# EAGLE board maplepad_pro (EAGLE 9.6.1)
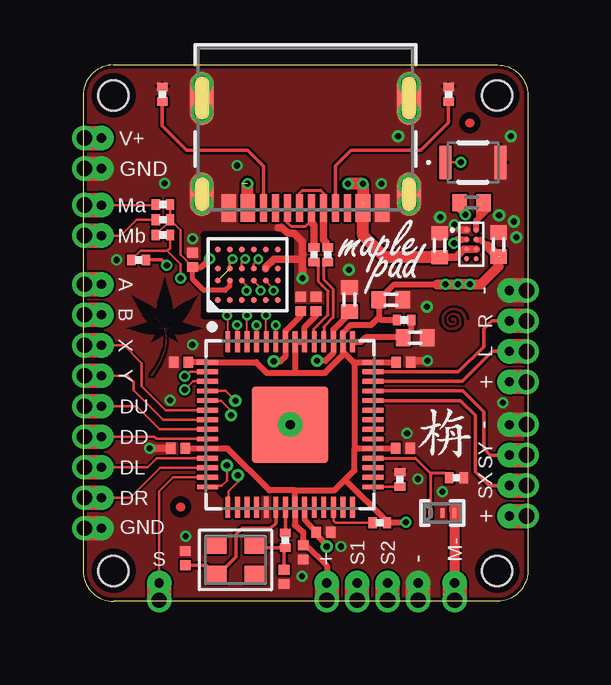
[diagram p0: board, top side]
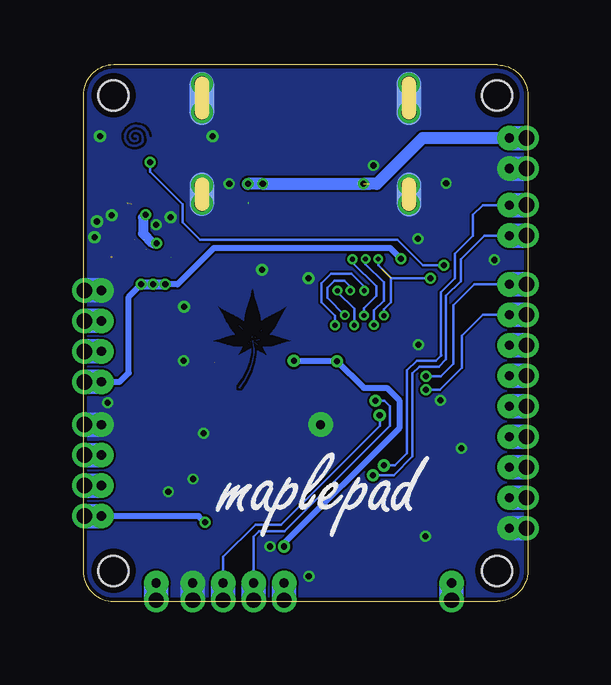
[diagram p1: board, bottom side, seen from below]

Size 18.54 x 22.35 mm. Coordinates in mm from the lower left corner, seen from the top.
Outline: 17.27,22.35 arc-90 18.54,21.08 18.54,1.27 arc-90 17.27,0 1.27,0 arc-90 0,1.27 0,21.08 arc-90 1.27,22.35 17.27,22.35
Copper layers (1*16): Top 0.035mm / dielectric 0.75mm / Bottom 0.035mm
Design rules "default *": minimum track width 3.5mil, minimum drill 8mil, track to track 3.5mil, track to pad 3.5mil, pad to pad 3.5mil, via to via 3.5mil, smd to smd 3.5mil, copper to edge 6mil, drill to drill 6mil, minimum pad ring 4mil, minimum via ring 4mil, stop-mask expansion 0mil, vias tented up to drill 30mil, thermal gap 10mil
Net classes: 1 power: width 0.305 mm
Holes 1.25 mm at 1.27,21.08 17.27,21.08 1.27,1.27 17.27,1.27
tRestrict: area 1.8,10.8 to 5,13.5; area 7,5.6 to 10.3,9.1; area 0.4,0.4 to 2.2,2.2; area 16.4,0.4 to 18.2,2.2; area 16.4,20.2 to 18.2,22; area 0.4,20.2 to 2.2,22; area 15.7,19.5 to 16.6,20.4; area 3.6,3.5 to 4.5,4.4; area 14.8,11.2 to 16.1,12.3; 17 lines
bRestrict: area 9.9,10.3 to 13.1,13; area 0.4,20.2 to 2.2,22; area 16.4,20.2 to 18.2,22; area 16.4,0.4 to 18.2,2.2; area 0.4,0.4 to 2.2,2.2; area 15.7,18.8 to 16.9,20

## Footprints (pad centres in the part's own frame; a part is rotated, then mirrored left to right if it is on the bottom)
TP10R = smd 1 x 1: TP 0,0
C0402 = smd 0.6 x 0.7: 1 -0.5,0; 2 0.5,0
C0201 = smd 0.4 x 0.45: 1 -0.3,0; 2 0.3,0
QFN56_7MM_REDUCEDEPAD = smd 0.875 x 0.2: 1 -3.45,2.6; 2 -3.45,2.2; 3 -3.45,1.8; 4 -3.45,1.4; 5 -3.45,1; 6 -3.45,0.6; 7 -3.45,0.2; 8 -3.45,-0.2; 9 -3.45,-0.6; 10 -3.45,-1; 11 -3.45,-1.4; 12 -3.45,-1.8; 13 -3.45,-2.2; 14 -3.45,-2.6; 29 3.45,-2.6; 30 3.45,-2.2; 31 3.45,-1.8; 32 3.45,-1.4; 33 3.45,-1; 34 3.45,-0.6; 35 3.45,-0.2; 36 3.45,0.2; 37 3.45,0.6; 38 3.45,1; 39 3.45,1.4; 40 3.45,1.8; 41 3.45,2.2; 42 3.45,2.6 | smd 0.2 x 0.875: 15 -2.6,-3.45; 16 -2.2,-3.45; 17 -1.8,-3.45; 18 -1.4,-3.45; 19 -1,-3.45; 20 -0.6,-3.45; 21 -0.2,-3.45; 22 0.2,-3.45; 23 0.6,-3.45; 24 1,-3.45; 25 1.4,-3.45; 26 1.8,-3.45; 27 2.2,-3.45; 28 2.6,-3.45; 43 2.6,3.45; 44 2.2,3.45; 45 1.8,3.45; 46 1.4,3.45; 47 1,3.45; 48 0.6,3.45; 49 0.2,3.45; 50 -0.2,3.45; 51 -0.6,3.45; 52 -1,3.45; 53 -1.4,3.45; 54 -1.8,3.45; 55 -2.2,3.45; 56 -2.6,3.45 | smd 3.2 x 3.2: P$1 0,0
2171790001_MOL = smd 0.991 x 1.803 bottom: 1 -4.316,2.728; 2 4.32,2.733 | smd 0.991 x 2.21 bottom: 3 4.316,-1.272; 4 -4.32,-1.272 | smd 0.991 x 2.21: 13 -4.32,-1.272; 14 4.32,-1.272 | smd 0.991 x 1.803: 15 -4.32,2.728; 16 4.32,2.728 | smd 0.61 x 1.143: A1/B12 -3.2,3.303; A4/B9 -2.4,3.303; B1/A12 3.2,3.303; B4/A9 2.4,3.303 | smd 0.305 x 1.143: A5 -1.25,3.303; A6 -0.25,3.303; A7 0.25,3.303; A8 1.25,3.303; B5 1.75,3.303; B6 0.75,3.303; B7 -0.75,3.303; B8 -1.75,3.303 | drill 0.61 pad 0.61: S_1_H1 -4.318,-0.686; S_1_H2 -4.318,-1.88; S_2_H1 4.318,-0.686; S_2_H2 4.318,-1.88; S_3_H1 -4.318,3.124; S_3_H2 -4.318,2.337; S_4_H1 4.318,3.124; S_4_H2 4.318,2.337
R0402 = smd 0.6 x 0.7: 1 -0.5,0; 2 0.5,0
R0201 = smd 0.35 x 0.45: 1 -0.3,0; 2 0.3,0
GSNAN0T000101 = smd 0.5 x 1.4: 1 -1.15,0; 2 1.15,0
YJK3_TEX = smd 0.4 x 0.16: 1 0,0; 2 0,-0.5; 3 0,0.5
ISL9122A = smd 0.215 x 0.215: A1 -0.2,0.6; A2 0.2,0.6; B1 -0.2,0.2; B2 0.2,0.2; C1 -0.2,-0.2; C2 0.2,-0.2; D1 -0.2,-0.6; D2 0.2,-0.6
WLCSP24 = smd 0.25 x 0.25: A1 -1.05,1.25; A2 -0.25,1.25; A3 0.25,1.25; A4 1.05,1.25; B1 -1.05,0.75; B2 -0.25,0.75; B3 0.25,0.75; B4 1.05,0.75; C1 -1.05,0.25; C2 -0.25,0.25; C3 0.25,0.25; C4 1.05,0.25; D1 -1.05,-0.25; D2 -0.25,-0.25; D3 0.25,-0.25; D4 1.05,-0.25; E1 -1.05,-0.75; E2 -0.25,-0.75; E3 0.25,-0.75; E4 1.05,-0.75; F1 -1.05,-1.25; F2 -0.25,-1.25; F3 0.25,-1.25; F4 1.05,-1.25
CRYSTAL_2.5X2 = smd 0.9 x 0.75: 1 -0.825,-0.625; 2 0.825,-0.625; 3 0.825,0.625; 4 -0.825,0.625

## Placement (x,y rotation side)
A  TPTP10R  [TP10R]  0.76,13.21 0 top
A0  TPTP10R  [TP10R]  0.76,16.51 0 top
B  TPTP10R  [TP10R]  0.76,11.94 0 top
B0  TPTP10R  [TP10R]  0.76,15.24 0 top
BGND  TPTP10R  [TP10R]  0.76,3.05 90 top
C1  10uF  [C0402]  14.86,14.84 90 top
C2  15pF  [C0201]  4.27,1.8 270 top
C3  15pF  [C0201]  8.38,1.02 90 top
C4  10uF  [C0402]  17.33,14.87 90 top
C5  0.1uF  [C0201]  4.09,9.96 180 top
C6  0.1uF  [C0201]  3.96,6.38 180 top
C7  0.1uF  [C0201]  13.36,9.96 0 top
C8  0.1uF  [C0201]  13.34,6.38 0 top
C9  0.1uF  [C0201]  9.71,12.39 90 top
C10  0.1uF  [C0201]  4.57,14.22 90 top
C11  0.1uF  [C0201]  9.18,2.04 270 top
C12  1uF  [C0402]  12.83,12.57 0 top
C13  0.1uF  [C0201]  10.03,2.89 0 top
C14  0.1uF  [C0201]  9.08,12.39 90 top
C15  1uF  [C0402]  11.1,12.58 90 top
C16  2.2uF  [C0402]  13.85,10.98 0 top
DD  TPTP10R  [TP10R]  0.76,6.86 0 top
DL  TPTP10R  [TP10R]  0.76,5.59 0 top
DR  TPTP10R  [TP10R]  0.76,4.32 0 top
DU  TPTP10R  [TP10R]  0.76,8.13 0 top
IC1  RP2040_QFN56  [QFN56_7MM_REDUCEDEPAD]  8.64,7.37 0 top
J2  2171790001  [2171790001_MOL]  9.27,19.68 180 top
L  TPTP10R  [TP10R]  17.78,10.41 0 top
L2  MCEE1005T1R0MHN  [R0402]  16.2,16.61 0 top
LR3.1  TPTP10R  [TP10R]  0.76,19.3 0 top
LR3.3  TPTP10R  [TP10R]  17.78,9.14 0 top
LRGND  TPTP10R  [TP10R]  17.78,12.95 0 top
LRGND1  TPTP10R  [TP10R]  0.76,18.03 0 top
R  TPTP10R  [TP10R]  17.78,11.68 0 top
R1  10k  [R0201]  12.37,3.28 0 top
R2  5.1k  [R0201]  15.24,21.13 270 top
R3  1k  [R0201]  8.43,2.54 270 top
R4  10k  [R0201]  3.33,15.27 180 top
R6  200  [R0201]  13.39,11.73 180 top
R7  22  [R0201]  10.2,14.44 90 top
R8  22  [R0201]  9.63,14.44 90 top
R9  4.7k  [R0201]  3.33,15.9 180 top
R10  4.7k  [R0201]  3.33,16.54 180 top
R11  5.1k  [R0201]  3.3,21.13 270 top
R12  0-ohm for I2C OLED  [R0201]  13.21,5.08 90 top
R13  10k  [R0201]  15.57,5.16 0 top
R14  1k  [R0201]  2.31,14.22 0 top
S  TPTP10R  [TP10R]  3.18,0.76 0 top
S1  GSNAN0T000101  [GSNAN0T000101]  16.26,18.29 0 top
S3.3  TPTP10R  [TP10R]  17.78,3.56 0 top
SCL  TPTP10R  [TP10R]  12.7,0.76 90 top
SDA  TPTP10R  [TP10R]  11.43,0.76 90 top
SGND  TPTP10R  [TP10R]  17.78,7.37 0 top
SX  TPTP10R  [TP10R]  17.78,4.83 0 top
SY  TPTP10R  [TP10R]  17.78,6.1 0 top
U1  CSD17585F5T  [YJK3_TEX]  14.99,3.68 90 top
U$1  ISL9122A  [ISL9122A]  16.2,14.88 0 top
U$25  W25Q128JVYIQ-TR  [WLCSP24]  6.86,13.61 90 top
V3.3  TPTP10R  [TP10R]  10.16,0.76 90 top
VGND  TPTP10R  [TP10R]  13.97,0.76 90 top
X  TPTP10R  [TP10R]  0.76,10.67 0 top
Y  TPTP10R  [TP10R]  0.76,9.4 0 top
Y1  12MHZ  [CRYSTAL_2.5X2]  6.35,1.73 180 top

## Library data of the parts
A A0 B B0 BGND DD DL DR DU L LR3.1 LR3.3 LRGND LRGND1 R S S3.3 SCL SDA SGND SX SY V3.3 VGND X Y = testpad
C1-C16 L2 R1-R4 R6-R14 = resistor
IC1 U$1 U$25 Y1 = personal
J2 = personal; COPYRIGHT: Copyright (C) 2022 Ultra Librarian. All rights reserved.; MANUFACTURER_PART_NUMBER: 2171790001; MFR_NAME: Molex Connector Corporation
S1 = personal; DESCRIPTION: Tactile Switches NANOT 100 AS; HEIGHT: 0.55mm; MANUFACTURER_NAME: C & K COMPONENTS; MANUFACTURER_PART_NUMBER: GSNAN0T000101; MOUSER_PART_NUMBER: 611-GSNAN0T000101; MOUSER_PRICE-STOCK: https://www.mouser.co.uk/ProductDetail/CK/GSNAN0T000101?qs=bAKSY%2FctAC7diJ%2FxJL3YRQ%3D%3D
U1 = personal; COPYRIGHT: Copyright (C) 2018 Accelerated Designs. All rights reserved; MANUFACTURER_PART_NUMBER: CSD17585F5T; SOURCELIBRARY: TI_2019-05-21; VENDOR: Texas Instruments

## Nets
1.2V: C13.1 C14.1 C15.1 IC1.23 IC1.45 IC1.50
!RESET: IC1.26 R1.1
+3V3: C4.1 C5.1 C6.1 C7.1 C8.1 C9.1 C10.1 C11.1 C12.1 IC1.1 IC1.10 IC1.22 IC1.33 IC1.42 IC1.44 IC1.48 IC1.49 LR3.3.TP R1.2 R4.2 R6.2 R9.1 R10.1 S3.3.TP U$1.B2 U$25.B2 V3.3.TP
A: A.TP IC1.2
B: B.TP IC1.3
D+: IC1.47 R8.1
D-: IC1.46 R7.1
DD: DD.TP IC1.9
DL: DL.TP IC1.11
DR: DR.TP IC1.12
DU: DU.TP IC1.8
GND [power]: BGND.TP C1.2 C2.1 C3.1 C4.2 C5.2 C6.2 C7.2 C8.2 C9.2 C10.2 C11.2 C12.2 C13.2 C14.2 C15.2 C16.2 IC1.19 IC1.P$1 J2.1 J2.2 J2.3 J2.4 J2.13 J2.14 J2.15 J2.16 J2.A1/B12 J2.B1/A12 J2.S_1_H1 J2.S_1_H2 J2.S_2_H1 J2.S_2_H2 J2.S_3_H1 J2.S_3_H2 J2.S_4_H1 J2.S_4_H2 LRGND1.TP LRGND.TP R2.1 R11.1 R12.2 R13.2 S1.2 SGND.TP U1.1 U$1.A1 U$25.E3 VGND.TP
M-: U1.2
MAPLEA: A0.TP IC1.14 R10.2
MAPLEB: B0.TP IC1.15 R9.2
N$1: IC1.41 R.TP
N$2: IC1.40 L.TP
N$3: L2.1 U$1.B1
N$4: L2.2 U$1.A2
N$5: C2.2 IC1.20 Y1.3
N$6: C3.2 R3.2 Y1.1
N$7: IC1.21 R3.1
N$8: R14.2 S1.1
N$9: C16.1 IC1.43 R6.1
N$10: J2.A7 J2.B7 R7.2
N$11: J2.A6 J2.B6 R8.2
N$12: IC1.39 SY.TP
N$13: IC1.38 SX.TP
N$16: IC1.29 R12.1
N$17: J2.B5 R11.2
N$18: J2.A5 R2.2
N$20: IC1.32 R13.1 U1.3
QSPI_CS: IC1.56 R4.1 R14.1 U$25.B3
QSPI_DATA[0]: IC1.53 U$25.E2
QSPI_DATA[1]: IC1.55 U$25.C3
QSPI_DATA[2]: IC1.54 U$25.D3
QSPI_DATA[3]: IC1.51 U$25.C2
QSPI_SCK: IC1.52 U$25.D2
S: IC1.13 S.TP
SCL: IC1.5 SCL.TP
SDA: IC1.4 SDA.TP
VCC: C1.1 J2.A4/B9 J2.B4/A9 LR3.1.TP U$1.C1 U$1.C2
X: IC1.6 X.TP
Y: IC1.7 Y.TP

## Tracks (layer width: path | path; a pad name or v marks a point on that pad's centre or on a via)
1.2V  (via drill 0.25 pad 0.51)
  Top 0.254: IC1.23 9.24,3.41 C13.1 9.82,2.68 10.16,2.34 v10.16,2.29 | v7.95,10 8.23,10 8.44,10.21 IC1.50 8.44,11.26 9.08,11.9 C14.1 | v9.75,10.02 10.1,10.02 10.44,10.36 IC1.45 10.44,11.32 11.11,11.99 C15.1
  Bottom 0.254: v9.75,10.02 7.97,10.02 v7.95,10 6.84,8.89 5.88,8.89 5.36,8.37 5.36,7.21 10.16,2.41 v10.16,2.29
!RESET
  Top 0.102: IC1.26 10.44,3.36 10.45,3.34 10.52,3.28 R1.1
+3V3  (via drill 0.25 pad 0.46, 0.38 pad 1.02, 0.64 pad 1.02)  (3 unrouted)
  Top 0.102: 3.03,15.19 R4.2 3.63,15.86 R9.1 | C10.1 4.06,14.43 4.06,15.46 R9.1 | R10.1 R9.1
  Top 0.152: 17.5,3.56 S3.3.TP | 12.73,3.34 R1.2 12.67,3.33
  Top 0.203: U$25.B2 6.11,13.14 5.93,12.96 5.03,12.96 4.57,13.42 C10.1
  Top 0.254: C5.1 5.18,9.96 IC1.1 7.22,9.97 7.65,9.53 7.65,9.52 8.84,9.52 | C6.1 4.22,6.37 IC1.10 6.03,6.37 7.77,4.62 8.84,4.62 | C8.1 IC1.33 11.32,6.37 | C7.1 13.1,9.97 IC1.42 11.32,9.97 | 10.84,10.4 IC1.44 10.84,11.2 11.15,11.52 12.02,11.52 12.33,11.83 | 10.84,10.4 10.84,10.27 10.09,9.52 8.84,9.52 | 11.32,9.97 11.27,9.97 10.84,10.4 | U$1.B2 16.59,15.08 16.88,14.79 | 8.84,9.52 IC1.49 IC1.48 9.24,11.43 9.71,11.91 C9.1 | 8.84,4.62 IC1.22 8.84,3.18 9.18,2.89 C11.1 9.3,2.34 10.16,1.48 V3.3.TP | 11.32,9.97 11.32,6.37 | 11.32,6.37 11.32,5.46 10.93,5.07 | 10.93,5.07 10.48,4.62 8.84,4.62 | 10.93,5.07 12.67,3.33 | R1.2 12.7,3.3 v13.46,3.3 | 12.33,11.83 C12.1 12.97,13.21 14.77,13.21 | 12.33,11.83 12.44,11.73 R6.2 | C10.1 4.93,13.92 v5.28,14.27
  Top 0.406: 16.25,13.21 v16.12,13.21 | v16.12,13.21 v15.62,13.21 v15.11,13.21 14.77,13.21 | 17.4,14.36 17.31,14.36 16.88,14.79 | v16.12,13.21 16.59,13.21 17.33,13.95 C4.1
  Top 1.016: LR3.3.TP v18.49,9.14 | V3.3.TP v10.16,0.05 | S3.3.TP v18.49,3.56
  Bottom 0.254: v13.46,3.3 13.72,3.56 S3.3.TP | LR3.3.TP 17.02,9.14 16.64,9.52 16.64,12.69 v16.12,13.21 | v5.28,14.27 5.73,14.72 13.09,14.72 14.61,13.21 v15.11,13.21
  Bottom 0.406: v16.12,13.21 v15.62,13.21 v15.11,13.21
  Bottom 1.016: S3.3.TP v18.49,3.56 | V3.3.TP v10.16,0.05 | LR3.3.TP v18.49,9.14
  other vias: 10.16,0.76 17.78,3.56 17.78,9.14
A  (via drill 0.25 pad 0.46, 0.38 pad 1.02, 0.64 pad 1.02)
  Top 0.102: IC1.2 4.44,9.57 v4.24,9.37
  Top 1.016: A.TP v0.05,13.21
  Bottom 0.102: v4.24,9.37 3.63,9.37 3.1,9.91 3.1,12.34 2.24,13.21 A.TP
  Bottom 1.016: A.TP v0.05,13.21
  other vias: 0.76,13.21
B  (via drill 0.25 pad 0.46, 0.38 pad 1.02, 0.64 pad 1.02)
  Top 0.102: IC1.3 4.59,9.17 v4.24,8.81
  Top 1.016: B.TP v0.05,11.94
  Bottom 0.102: B.TP 1.88,11.94 2.74,11.07 2.74,9.73 3.66,8.81 v4.24,8.81
  Bottom 1.016: B.TP v0.05,11.94
  other vias: 0.76,11.94
D+
  Top 0.127: IC1.47 9.64,11.36 10.21,11.94 10.21,12.93 9.98,13.16 | R8.1 9.83,13.95 9.83,13.31 9.98,13.16 | 9.98,13.16 9.96,13.18
D-
  Top 0.127: 10.31,14.04 R7.1 10.2,14.12 10.05,13.96 10.05,13.4 10.43,13.01 10.43,11.83 10.04,11.43 IC1.46
DD  (via drill 0.38 pad 1.02, 0.64 pad 1.02)
  Top 0.102: IC1.9 3.06,6.77 2.97,6.86 DD.TP
  Top 1.016: DD.TP v0.05,6.86
  Bottom 1.016: DD.TP v0.05,6.86
  other vias: 0.76,6.86
DL  (via drill 0.38 pad 1.02, 0.64 pad 1.02)
  Top 0.102: DL.TP 2.69,5.59 3.07,5.97 IC1.11
  Top 1.016: DL.TP v0.05,5.59
  Bottom 1.016: DL.TP v0.05,5.59
  other vias: 0.76,5.59
DR  (via drill 0.38 pad 1.02, 0.64 pad 1.02)
  Top 0.102: IC1.12 3.2,5.57 1.96,4.32 DR.TP
  Top 1.016: DR.TP v0.05,4.32
  Bottom 1.016: DR.TP v0.05,4.32
  other vias: 0.76,4.32
DU  (via drill 0.38 pad 1.02, 0.64 pad 1.02)
  Top 0.102: DU.TP 2.24,8.13 3.2,7.17 IC1.8
  Top 1.016: DU.TP v0.05,8.13
  Bottom 1.016: DU.TP v0.05,8.13
  other vias: 0.76,8.13
GND  (via drill 0.25 pad 0.46, 0.25 pad 0.51, 0.38 pad 1.02, 0.64 pad 1.02)
  Top 0.305: 13.63,9.98 13.67,10.02 v14.35,10.02 | C15.2 | C6.2 v2.77,6.38 | U$25.E3 7.62,13.91 7.96,14.26 9.11,14.26 9.14,14.22 | v9.14,13.46 9.14,14.22 | 9.14,14.22 9.14,14.99 8.8,15.33 8.54,15.33 8.3,15.57 8.13,15.57 | U$1.A1 15.71,15.47 v15.49,15.7
  Top 1.016: LRGND.TP v18.49,12.95 | SGND.TP v18.49,7.37 | VGND.TP v13.97,0.05 | BGND.TP v0.05,3.05 | v0.05,18.03 LRGND1.TP
  Bottom 1.016: LRGND.TP v18.49,12.95 | SGND.TP v18.49,7.37 | VGND.TP v13.97,0.05 | BGND.TP v0.05,3.05 | v0.05,18.03 LRGND1.TP
  other vias: 18.07,15.18 17.97,15.83 13.97,0.76 17.78,7.37 17.78,12.95 8.64,7.37 13.51,7.01 4.56,10.69 10.75,2.29 9.13,1.04 4.27,2.72 0.76,3.05 0.76,18.03 17.35,16.09 11.08,13.82 4.57,15.11 12.45,17.4 3.4,17.42 13.95,5.1 14.99,4.57 14.33,12.28 17.51,8.27 6.43,18.16 1.4,14.22 13.14,19.38 14.89,16 17.84,19.38 3.63,8.38
  pour Bottom (rank 2, no thermals): 0,21.08 0,1.27 arc90 1.27,0 17.27,0 arc90 18.54,1.27 18.54,21.08 arc90 17.27,22.35 1.27,22.35 arc90
  pour Top (rank 2, no thermals): 0,21.08 0,1.27 arc90 1.27,0 17.27,0 arc90 18.54,1.27 18.54,21.08 arc90 17.27,22.35 1.27,22.35 arc90
  pour Top: 15.09,12.06 15.09,11.38 15.7,11.38 15.7,12.06
  pour Bottom (no thermals): 17.09,20.04 17.09,18.59 15.44,18.59 15.44,20.04
M-  (via drill 0.38 pad 1.02, 0.64 pad 1.02)
  Top 0.406: v15.49,0.76 v15.49,0.77 U1.2 15.49,3.93
  Top 1.016: v15.49,0.76 v15.49,0.05
  Bottom 1.016: v15.49,0.76 v15.49,0.05
MAPLEA  (via drill 0.25 pad 0.51, 0.38 pad 1.02, 0.64 pad 1.02)
  Top 0.102: IC1.14 5.51,4.77 5.56,4.82 5.78,4.82 5.99,5.03 v5.99,5.66 | R10.2 3,16.51 A0.TP
  Top 1.016: A0.TP v0.05,16.51
  Bottom 0.102: A0.TP 1.88,16.51 2.29,16.1 2.29,15.24 3.05,14.48 3.05,13.46 3.63,12.88 3.63,10.24 | 3.63,10.24 3.84,10.03 4.62,10.03 5.03,9.63 5.03,6.17 5.54,5.66 v5.99,5.66 | 3.63,10.24 3.61,10.26
  Bottom 1.016: v0.05,16.51 A0.TP
  other vias: 0.76,16.51
MAPLEB  (via drill 0.25 pad 0.51, 0.38 pad 1.02, 0.64 pad 1.02)
  Top 0.102: IC1.15 6.04,4.29 6.06,4.31 6.06,4.59 6.45,4.98 v6.45,5.26 | B0.TP 1.58,15.24 2.24,15.9 R9.2
  Top 1.016: B0.TP v0.05,15.24
  Bottom 0.102: B0.TP 1.8,15.24 2.79,14.25 2.79,13.33 3.4,12.72 3.4,10.08 3.71,9.78 4.52,9.78 4.8,9.5 4.8,6.04 5.59,5.26 v6.45,5.26
  Bottom 1.016: v0.05,15.24 B0.TP
  other vias: 0.76,15.24
N$1  (via drill 0.38 pad 1.02, 0.64 pad 1.02)
  Top 0.152: IC1.41 15.66,9.56 16.71,10.62 16.71,11.35 17.04,11.68 R.TP
  Top 1.016: R.TP v18.49,11.68
  Bottom 1.016: R.TP v18.49,11.68
  other vias: 17.78,11.68
N$2  (via drill 0.38 pad 1.02, 0.64 pad 1.02)
  Top 0.152: L.TP 17.07,10.41 15.82,9.17 IC1.40
  Top 1.016: L.TP v18.49,10.41
  Bottom 1.016: L.TP v18.49,10.41
  other vias: 17.78,10.41
N$3  (via drill 0.25 pad 0.46)  (1 unrouted)
  Top 0.254: U$1.B1 15.77,15.07 15.75,15.06
  Top 0.305: v15.47,14.92 15.61,15.06 15.75,15.06 | L2.1 15.7,16.35 v15.94,16.11
  Bottom 0.406: v15.94,16.11 16.05,16 16.05,15.34 15.63,14.92 v15.47,14.92
N$4  (1 unrouted)
  Top 0.254: U$1.A2 16.4,15.86 16.53,15.99 | 16.53,15.99 16.87,16.34 | 16.53,15.99 16.53,16.56
N$5
  Top 0.152: 5.13,1.5 | C2.2 5.13,1.5 | 5.13,1.5 Y1.3 5.62,1.1 6.38,1.86 6.38,2.79 6.63,3.05 7.82,3.05 8.04,3.26 IC1.20
N$6
  Top 0.152: Y1.1 7.29,2.24 R3.2 8.38,2.23 C3.2
N$7
  Top 0.152: IC1.21 8.44,2.8 R3.1
N$8  (via drill 0.25 pad 0.46)
  Top 0.102: v15.75,18.29 S1.1
  Top 0.152: R14.2 3.27,14.22 v3.49,14
  Bottom 0.102: v3.49,14 4.37,14 5.43,15.06 13.67,15.06 14.39,15.79 14.39,16.55 15.75,17.91 v15.75,18.29
N$9
  Top 0.254: 13.33,11 C16.1 13.69,11.32 R6.1 | 13.33,11 11.78,11 11.59,10.82 IC1.43 | 13.37,11.03 13.33,11
N$10
  Top 0.127: J2.A7 9.02,16.99 9.16,17.13 9.9,17.13 10.02,17.01 J2.B7
  Top 0.305: R7.2 10.13,14.82 10.13,14.96 10.02,15.06 J2.B7
N$11
  Top 0.127: R8.2 9.63,14.75 | J2.B6 8.52,15.77 8.66,15.63 9.28,15.63 9.52,15.88
  Top 0.305: R8.2 9.63,15.68 9.52,15.79 9.52,15.88 J2.A6
N$12  (via drill 0.38 pad 1.02, 0.64 pad 1.02)  (1 unrouted)
  Top 0.152: IC1.39 15.85,8.77 16.71,7.9 16.71,6.38 16.99,6.1 SY.TP
  Top 1.016: SY.TP v18.49,6.1
  Bottom 1.016: SY.TP v18.49,6.1
  other vias: 17.78,6.1
N$13  (via drill 0.38 pad 1.02, 0.64 pad 1.02)
  Top 0.152: SX.TP 16.94,4.83 16.36,5.41 16.36,7.75 15.74,8.37 IC1.38
  Top 1.016: SX.TP v18.49,4.83
  Bottom 1.016: SX.TP v18.49,4.83
  other vias: 17.78,4.83
N$14
  pour Top: 2.86,9.4 2.88,9.4 2.89,9.4 2.91,9.42 2.94,9.47 2.99,9.55 3.05,9.64 3.11,9.75 3.16,9.84 3.23,9.99 3.3,10.12 3.35,10.26 3.4,10.4 3.43,10.54 3.46,10.67 3.48,10.78 3.49,10.89 3.49,11 3.49,11.09 3.48,11.1 3.48,11.14 3.47,11.22 3.45,11.31 3.45,11.32 3.45,11.33 3.45,11.33 3.58,11.22 3.68,11.13 3.69,11.12 3.65,11.17 3.61,11.21 3.51,11.31 3.47,11.34 3.45,11.35 3.45,11.36 3.46,11.36 3.64,11.4 3.72,11.41 3.83,11.42 3.92,11.42 4.08,11.42 4.15,11.42 4.25,11.41 4.25,11.42 4.21,11.42 4.08,11.43 3.98,11.43 3.89,11.43 3.71,11.42 3.55,11.39 3.45,11.38 3.44,11.38 3.44,11.39 3.46,11.41 3.52,11.5 3.55,11.54 3.65,11.65 3.71,11.72 3.77,11.79 3.81,11.83 4.12,12.15 3.93,11.97 3.81,11.85 3.72,11.76 3.64,11.66 3.57,11.59 3.49,11.49 3.42,11.39 3.41,11.4 3.41,11.42 3.4,11.5 3.39,11.63 3.38,11.7 3.38,11.93 3.38,12.45 3.38,12.55 3.37,12.45 3.37,12.21 3.37,11.7 3.37,11.62 3.39,11.41 3.39,11.41 3.37,11.43 3.31,11.52 3.25,11.58 3.16,11.68 3.08,11.77 2.95,11.91 2.83,12.02 2.78,12.07 2.72,12.12 2.67,12.17 2.98,11.85 3.03,11.8 3.14,11.68 3.27,11.53 3.34,11.44 3.37,11.4 3.38,11.38 3.38,11.37 3.34,11.38 3.14,11.39 2.99,11.4 2.74,11.4 2.63,11.4 2.59,11.4 3,11.39 3.16,11.38 3.31,11.36 3.35,11.36 3.36,11.36 3.36,11.35 3.29,11.31 3.27,11.29 3.18,11.22 3.19,11.21 3.2,11.22 3.22,11.23 3.29,11.28 3.32,11.3 3.38,11.34 3.39,11.34 3.4,11.33 3.4,11.32 3.42,11.25 3.44,11.16 3.45,11.07 3.45,10.99 3.45,10.9 3.44,10.81 3.43,10.71 3.41,10.61 3.39,10.51 3.36,10.41 3.33,10.3 3.28,10.17 3.22,10.04 3.16,9.92 3.09,9.79 3.05,9.73 3.02,9.68 2.97,9.61 2.84,9.46 2.82,9.42 2.83,9.42 2.83,9.41 2.84,9.4
N$15
  pour Bottom: 12.02,8.89 12,8.89 11.99,8.89 11.98,8.92 11.94,8.96 11.89,9.04 11.83,9.13 11.77,9.24 11.72,9.33 11.65,9.48 11.59,9.61 11.53,9.75 11.49,9.9 11.45,10.03 11.42,10.16 11.41,10.27 11.4,10.39 11.4,10.5 11.4,10.59 11.4,10.6 11.41,10.64 11.42,10.71 11.44,10.8 11.44,10.81 11.44,10.82 11.43,10.82 11.31,10.71 11.2,10.62 11.2,10.61 11.24,10.66 11.28,10.7 11.38,10.8 11.42,10.83 11.43,10.84 11.44,10.85 11.43,10.86 11.24,10.89 11.16,10.9 11.05,10.91 10.96,10.91 10.8,10.91 10.73,10.91 10.63,10.91 10.64,10.91 10.68,10.91 10.81,10.92 10.91,10.92 11,10.92 11.18,10.91 11.34,10.89 11.43,10.87 11.44,10.87 11.44,10.88 11.42,10.91 11.37,10.99 11.33,11.04 11.24,11.14 11.17,11.22 11.11,11.28 11.08,11.32 10.76,11.64 10.96,11.46 11.08,11.34 11.16,11.25 11.25,11.16 11.31,11.08 11.4,10.98 11.47,10.88 11.47,10.89 11.48,10.91 11.49,10.99 11.5,11.12 11.5,11.19 11.5,11.42 11.51,11.94 11.51,12.05 11.51,11.95 11.51,11.71 11.51,11.2 11.51,11.12 11.49,10.91 11.5,10.91 11.51,10.92 11.58,11.01 11.64,11.08 11.72,11.17 11.8,11.26 11.94,11.4 12.05,11.51 12.1,11.56 12.16,11.61 12.21,11.66 11.9,11.34 11.85,11.29 11.74,11.17 11.61,11.02 11.55,10.94 11.52,10.89 11.5,10.87 11.51,10.86 11.55,10.87 11.75,10.89 11.9,10.89 12.15,10.9 12.26,10.89 12.29,10.89 11.88,10.88 11.72,10.87 11.57,10.85 11.53,10.85 11.52,10.85 11.52,10.84 11.59,10.8 11.62,10.78 11.7,10.71 11.7,10.71 11.69,10.71 11.66,10.72 11.6,10.77 11.57,10.8 11.5,10.83 11.49,10.83 11.49,10.82 11.48,10.82 11.46,10.74 11.45,10.65 11.44,10.56 11.43,10.48 11.43,10.39 11.44,10.3 11.45,10.2 11.47,10.1 11.5,10.01 11.52,9.9 11.56,9.8 11.61,9.66 11.66,9.54 11.72,9.41 11.79,9.29 11.83,9.22 11.87,9.17 11.91,9.1 12.04,8.95 12.06,8.92 12.06,8.91 12.05,8.9 12.04,8.9
N$16
  Top 0.102: IC1.29 R12.1
N$17
  Top 0.152: R11.2 3.3,19.81 4.33,18.79 6.87,18.79 7.52,18.13 J2.B5
N$18
  Top 0.152: R2.2 15.24,19.94 14.1,18.8 11.18,18.8 10.52,18.15 J2.A5
N$19
  cutout Top: 4.95,14.73 4.95,11.94 arc90 5.08,11.81 8.64,11.81 arc90 8.76,11.94 8.76,15.24 arc90 8.64,15.37 5.08,15.37 arc90 4.95,15.24
N$20
  Top 0.127: IC1.32 13.86,5.97 14.49,5.34 | 15.27,5.12 R13.1 15.08,5.34 14.49,5.34 | 14.49,5.34 U1.3
QSPI_CS  (via drill 0.2 pad 0.41, 0.25 pad 0.46)  (1 unrouted)
  Top 0.089: IC1.56 6.04,11.87 v6,11.91
  Top 0.102: U$25.B3 6.11,14.14 v6.23,14.26 | v4.06,13.46 4.06,14.05 3.51,14.6 | R14.1 2.39,14.6 3.51,14.6 | 3.51,14.6 3.63,14.72 R4.1
  Bottom 0.102: v6,11.91 6,12.16 5.71,12.46 5.71,13.46 | v6.23,14.26 6.23,14 5.69,13.46 v4.06,13.46
QSPI_DATA[0]  (via drill 0.2 pad 0.41)
  Top 0.089: v7.94,12.95 7.94,13.04 U$25.E2 | IC1.53 v7.24,11.5 v7.23,11.51
  Bottom 0.102: v7.23,11.51 7.23,12.19 7.94,12.89 v7.94,12.95
QSPI_DATA[1]  (via drill 0.2 pad 0.41)
  Top 0.089: IC1.55 6.44,11.5 v6.42,11.52
  Top 0.102: U$25.C3 6.61,14.11 v6.76,14.27
  Bottom 0.102: v6.42,11.52 6.42,12.13 6.01,12.54 6.01,13.29 6.76,14.05 v6.76,14.27
QSPI_DATA[2]  (via drill 0.2 pad 0.41)
  Top 0.089: v6.83,11.91 v6.84,11.91 IC1.54
  Top 0.102: v7.31,14.26 7.31,14.25 7.11,14.05 U$25.D3
  Bottom 0.102: v7.31,14.26 7.31,14.11 6.32,13.13 6.32,12.73 6.83,12.22 v6.83,11.91
QSPI_DATA[3]  (via drill 0.2 pad 0.41)
  Top 0.089: U$25.C2 6.82,13.15 v6.82,12.95 | IC1.51 8.04,10.94 8.03,10.95 v8.03,11.5
  Bottom 0.102: v6.82,12.95 6.82,13.1 7.36,13.64 8.2,13.64 8.6,13.25 8.6,12.47 8.03,11.91 v8.03,11.5
QSPI_SCK  (via drill 0.2 pad 0.41)
  Top 0.089: U$25.D2 7.4,13.07 v7.4,12.95 | IC1.52 v7.64,11.92 v7.63,11.93
  Bottom 0.102: v7.4,12.95 7.4,13.12 7.65,13.36 8.05,13.36 8.35,13.06 8.35,12.65 v7.63,11.93
S  (via drill 0.38 pad 1.02, 0.64 pad 1.02)
  Top 0.102: IC1.13 3.74,5.17 3.18,4.6 S.TP
  Top 1.016: S.TP v3.18,0.05
  Bottom 1.016: S.TP v3.18,0.05
  other vias: 3.18,0.76
SCL  (via drill 0.25 pad 0.51, 0.38 pad 1.02, 0.64 pad 1.02)
  Top 0.102: IC1.5 5.75,8.37 6.17,7.95 v6.17,7.76
  Top 1.016: SCL.TP v12.7,0.05
  Bottom 0.102: SCL.TP 12.7,1.85 11.35,3.2 10.29,3.2 6.17,7.31 v6.17,7.76
  Bottom 1.016: SCL.TP v12.7,0.05
  other vias: 12.7,0.76
SDA  (via drill 0.25 pad 0.51, 0.38 pad 1.02, 0.64 pad 1.02)
  Top 0.102: IC1.4 5.94,8.77 v6.35,8.36
  Top 1.016: SDA.TP v11.43,0.05
  Bottom 0.102: v6.35,8.36 5.97,8.36 5.74,8.13 5.74,7.31 10.14,2.92 11.2,2.92 11.43,2.69 SDA.TP
  Bottom 1.016: SDA.TP v11.43,0.05
  other vias: 11.43,0.76
VCC  (via drill 0.25 pad 0.46, 0.38 pad 1.02, 0.64 pad 1.02)  (5 unrouted)
  Top 0.254: U$1.C1 15.9,14.67
  Top 0.305: U$1.C2 U$1.C1 | C1.1 15.55,14.34 15.88,14.66 15.9,14.66
  Top 0.508: 11.67,16.6 J2.A4/B9 11.67,15.25 12.59,14.34 C1.1 | 11.67,16.59 v11.67,17.4 v11.05,17.4 | J2.B4/A9 6.86,16.39 v6.86,17.4
  Top 1.016: LR3.1.TP v0.05,19.3
  Bottom 0.508: 6.6,17.4 v11.05,17.4 v11.67,17.4 | LR3.1.TP 4.38,19.3 6.29,17.4 v6.86,17.4
  Bottom 1.016: v0.05,19.3 LR3.1.TP
  other vias: 0.76,19.3
X  (via drill 0.38 pad 1.02, 0.64 pad 1.02)
  Top 0.102: X.TP 1.7,10.67 2.44,9.93 2.44,8.97 3.44,7.97 IC1.6
  Top 1.016: X.TP v0.05,10.67
  Bottom 1.016: X.TP v0.05,10.67
  other vias: 0.76,10.67
Y  (via drill 0.38 pad 1.02, 0.64 pad 1.02)
  Top 0.102: IC1.7 3.33,7.57 2.11,8.79 2.11,9.14 1.85,9.4 Y.TP
  Top 1.016: Y.TP v0.05,9.4
  Bottom 1.016: Y.TP v0.05,9.4
  other vias: 0.76,9.4
(copper drawn outside any net)
  shapes: Top circle x2

## Text on the board
tPlace: V+ | GND | Ma | Mb | A | - | B | R | X | L | Y | + | DU | - | DD | DL | SY | SX | DR | + | GND | S | + | S1 | S2 | - | M-
202bmp: mackie kannard-smith | 2021